# EAGLE board SeanOptoIsolatorCircuit (EAGLE 9.5.1)

Size 160 x 100 mm. Coordinates in mm from the lower left corner, seen from the top.
Outline: 0,0 160,0 160,100 0,100 0,0
Copper layers (1*16): Top 0.035mm / dielectric 1.5mm / Bottom 0.035mm
Design rules "default": minimum track width 6mil, minimum drill 0.35mm, track to track 6mil, track to pad 6mil, pad to pad 6mil, via to via 6mil, smd to smd 6mil, copper to edge 40mil, drill to drill 6mil, minimum pad ring 10mil, minimum via ring 8mil, stop-mask expansion 4mil, vias tented up to drill 0mil, thermal gap 10mil

## Footprints (pad centres in the part's own frame; a part is rotated, then mirrored left to right if it is on the bottom)
C025-024X044 = drill 0.813 pad 1.422 octagon: 1 -1.27,0; 2 1.27,0
BROADCOM_HCNR200-300E_0 = smd 2.29 x 1.3: 1 -5.635,3.81; 2 -5.635,1.27; 3 -5.635,-1.27; 4 -5.635,-3.81; 5 5.635,-3.81; 6 5.635,-1.27; 7 5.635,1.27; 8 5.635,3.81
0204/5 = drill 0.813 pad 1.676 octagon: 1 -2.54,0; 2 2.54,0
SOIC8-N_MC-L = smd 1.676 x 0.508: 1 -2.311,1.905; 2 -2.311,0.635; 3 -2.311,-0.635; 4 -2.311,-1.905; 5 2.311,-1.905; 6 2.311,-0.635; 7 2.311,0.635; 8 2.311,1.905

## Placement (x,y rotation side)
C1  [C025-024X044]  33.02,36.83 0 top
C2  [C025-024X044]  16.51,33.02 0 top
C3  [C025-024X044]  -39.37,-22.86 0 top  (outside the outline)
Q1  BROADCOM_HCNR200-300EBROADCOM_HCNR200-300E_0_0  [BROADCOM_HCNR200-300E_0]  30.48,20.32 270 top
R1  [0204/5]  36.83,30.48 0 top
R2  [0204/5]  46.99,35.56 180 top
R3  [0204/5]  54.61,35.56 0 top
R4  [0204/5]  -38.1,-27.94 0 top  (outside the outline)
U1  MCP6002-E/SNSOIC8-N_MC-L  [SOIC8-N_MC-L]  44.45,19.05 270 top
U2  MCP6002-E/SNSOIC8-N_MC-L  [SOIC8-N_MC-L]  16.51,19.05 270 top

## Library data of the parts
C1-C3 R1-R4 = adafruit
Q1 = Broadcom - HCNR200-300E; AUTOMOTIVE: No; CENTROID_NOT_SPECIFIED: No; DATASHEET: https://docs.broadcom.com/docs/AV02-0886EN; DEVICE_CLASS_L1: Optoelectronics; DEVICE_CLASS_L2: Optocouplers; DEVICE_CLASS_L3: unset; DIGIKEY_DESCRIPTION: OPTOISO 5KV LINEAR PHVOLT 8DIPGW; DIGIKEY_PART_NUMBER: 516-1608-5-ND; FOOTPRINT_VARIANT_NAME_0: Recommended_Land_Pattern; FORWARD_CURRENT: 10mA; FORWARD_VOLTAGE: 1.6V; HEIGHT: 5mm; ISOLATION_VOLTAGE: 5000Vrms; LEAD_FREE: Yes; MAX_CURRENT_TRANSFER_RATIO: 0.75%; MAX_JUNCTION_TEMP: +125°C; MF: Broadcom; MFG_PACKAGE_IDENT: 0; MFG_PACKAGE_IDENT_DATE: 0; MFG_PACKAGE_IDENT_REV: 0; MIN_CURRENT_TRANSFER_RATIO: 0.25%; MOUSER_DESCRIPTION: Optocoupler DC-IN 1-CH Linear Photovoltaic DC-OUT 8-Pin PDIP W SMD Tube; MOUSER_PART_NUMBER: 630-HCNR200-300E; MPN: HCNR200-300E; PACKAGE: DIP8 GULL WING; POWER_DISSIPATION: 60mW; PREFIX: Q; REVERSE_VOLTAGE: 2.5V; ROHS: Yes; STANDOFF_HEIGHT: 0.5mm; TEMPERATURE_RANGE_HIGH: +85°C; TEMPERATURE_RANGE_LOW: -40°C; VERIFICATION_VERSION: 0.0.0.3
U1 U2 = MCP6002; BUILT_BY: EMA_Jessica; COPYRIGHT: Copyright (C) 2018 Accelerated Designs. All rights reserved; MANUFACTURER_PART_NUMBER: MCP6002-E/SN; VENDOR: Microchip

## Nets
GND: Q1.4 R3.1 U1.3 U1.4
GND-ISO: U2.4
N$1: C1.2 C2.2 Q1.3 R2.1 R3.2 U1.2
N$2: C1.1 C2.1 R1.2 U1.1
N$3: Q1.1 R1.1
N$4: C3.2 Q1.6 R4.1 U2.2
N$5: C3.1 R4.2 U2.1
N$6: Q1.5 U2.3
VCC-ISO: U2.8
VDD: Q1.2 R2.2

## Tracks (layer width: path | path; a pad name or v marks a point on that pad's centre or on a via)
GND  (3 unrouted)
N$1  (5 unrouted)
N$2  (3 unrouted)
N$3  (1 unrouted)
N$4  (3 unrouted)
N$5  (2 unrouted)
N$6  (1 unrouted)
VDD  (1 unrouted)